# Altium PCB Project_design.PcbDoc
Units mm, origin at the board's own origin, x right, y up, seen from the top; angles counter-clockwise.
Board outline 73 x 40.6 mm, 4 copper layers (Top Layer, Layer 1, Layer 2, Bottom Layer), stack 0.866 mm thick; 56 components, 38 nets, 244 pads, 93 vias.
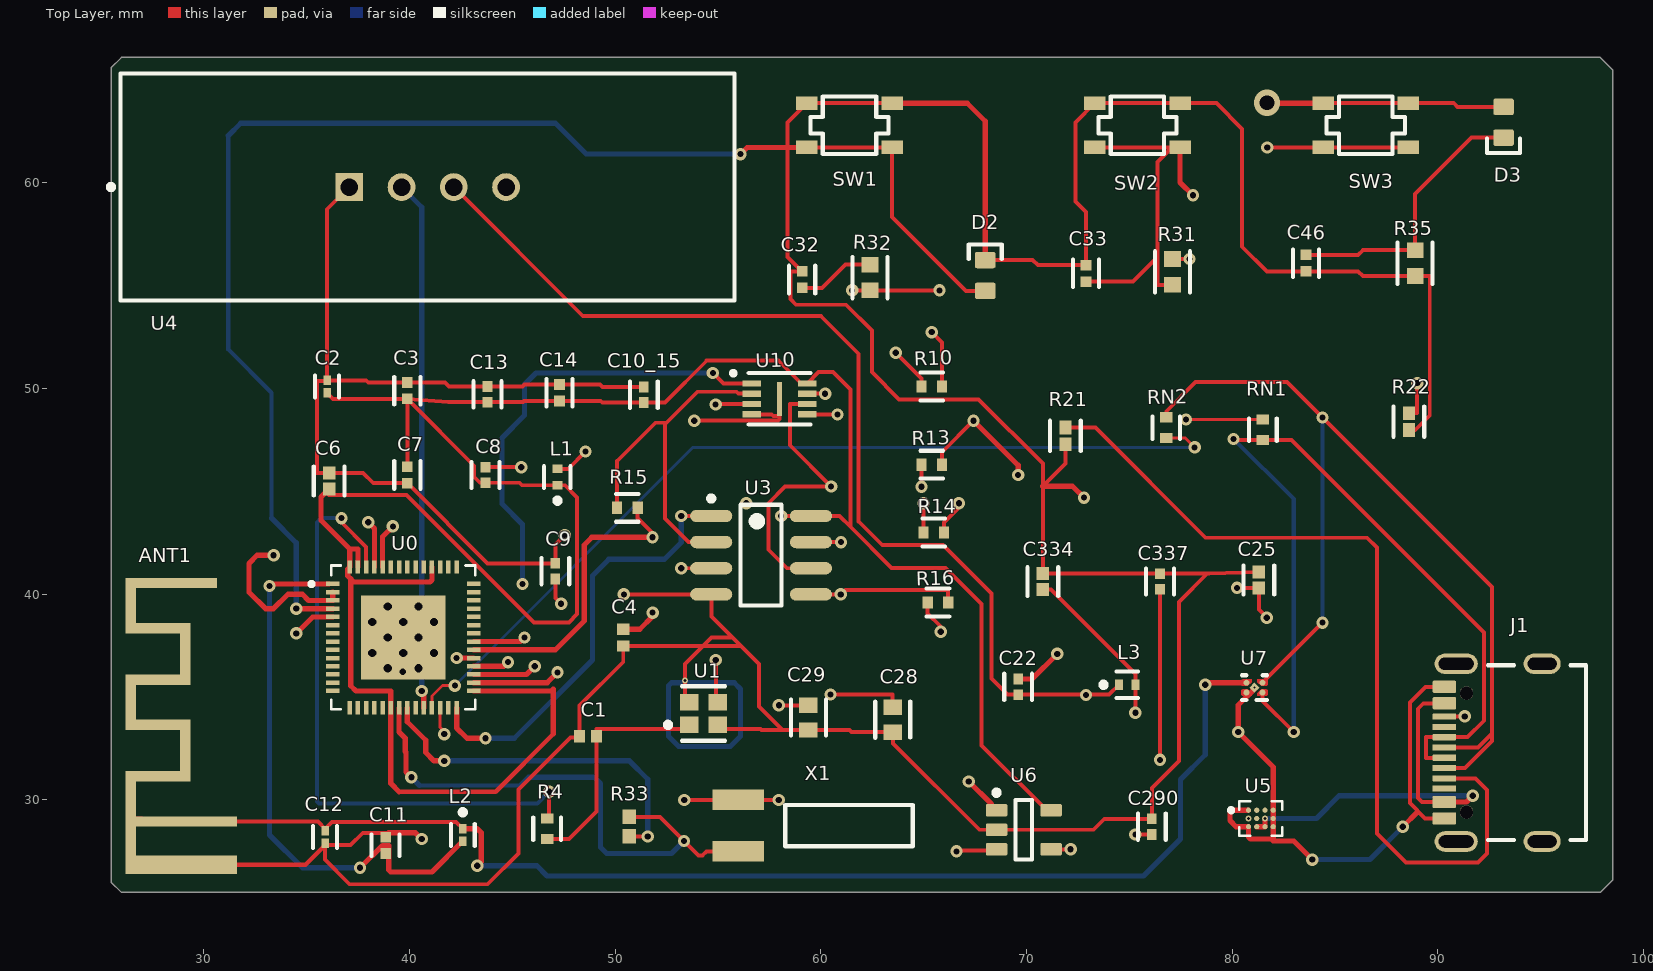
[diagram p0: Top Layer view]
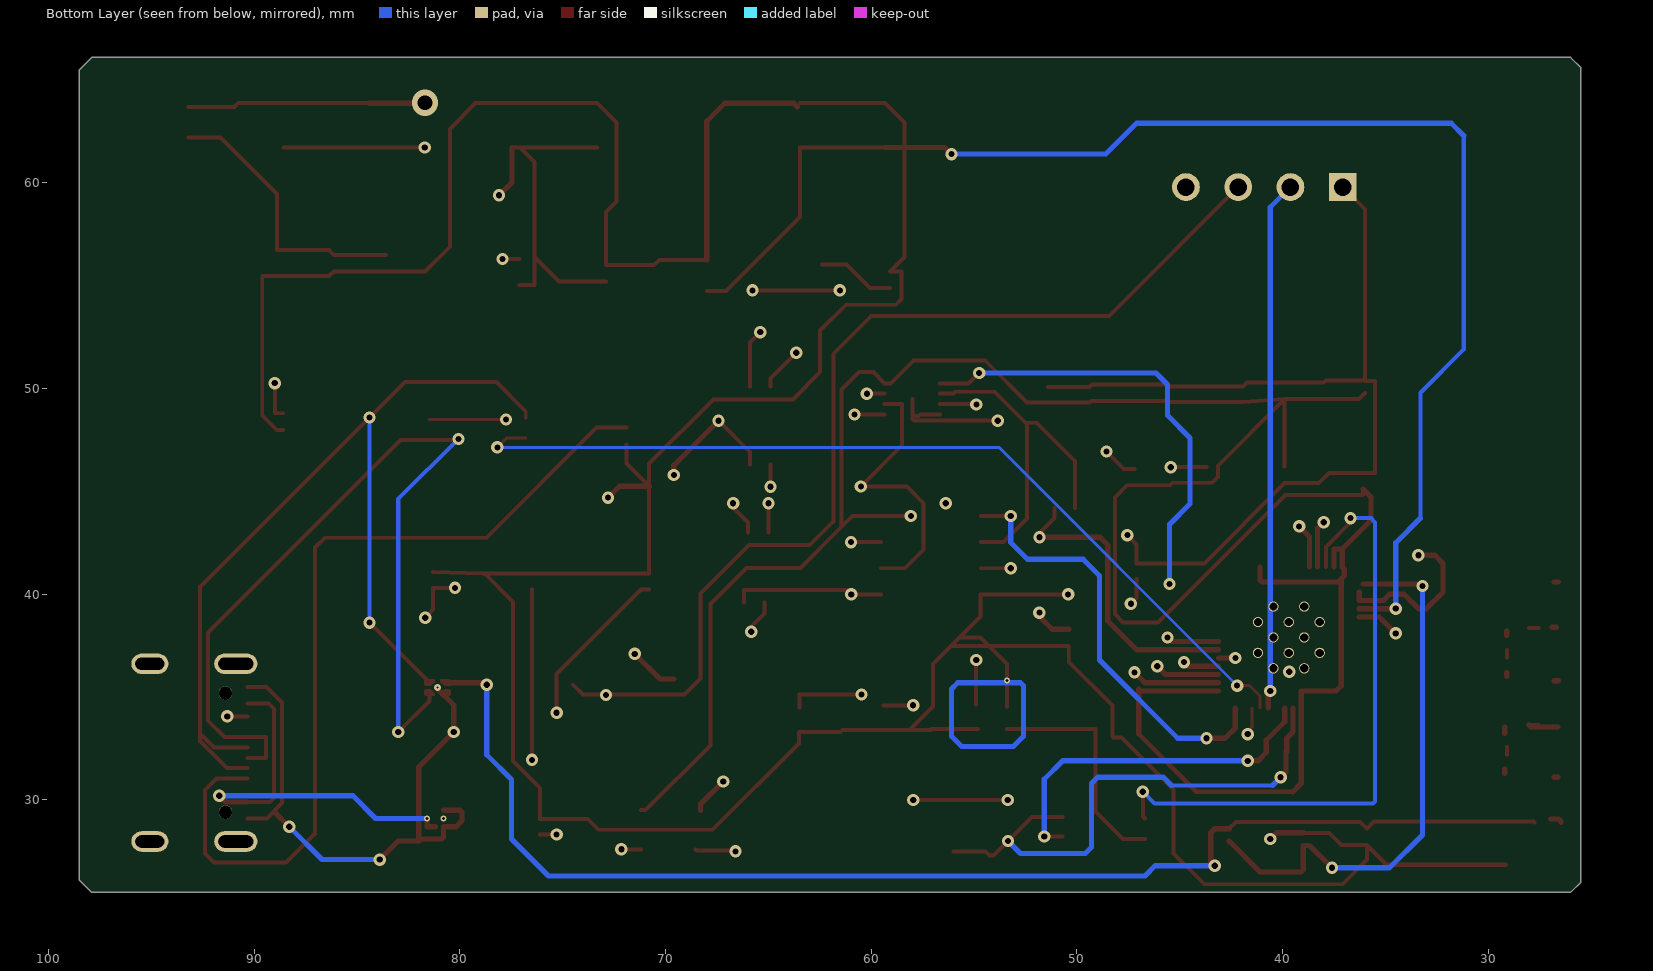
[diagram p1: Bottom Layer view, seen from below]
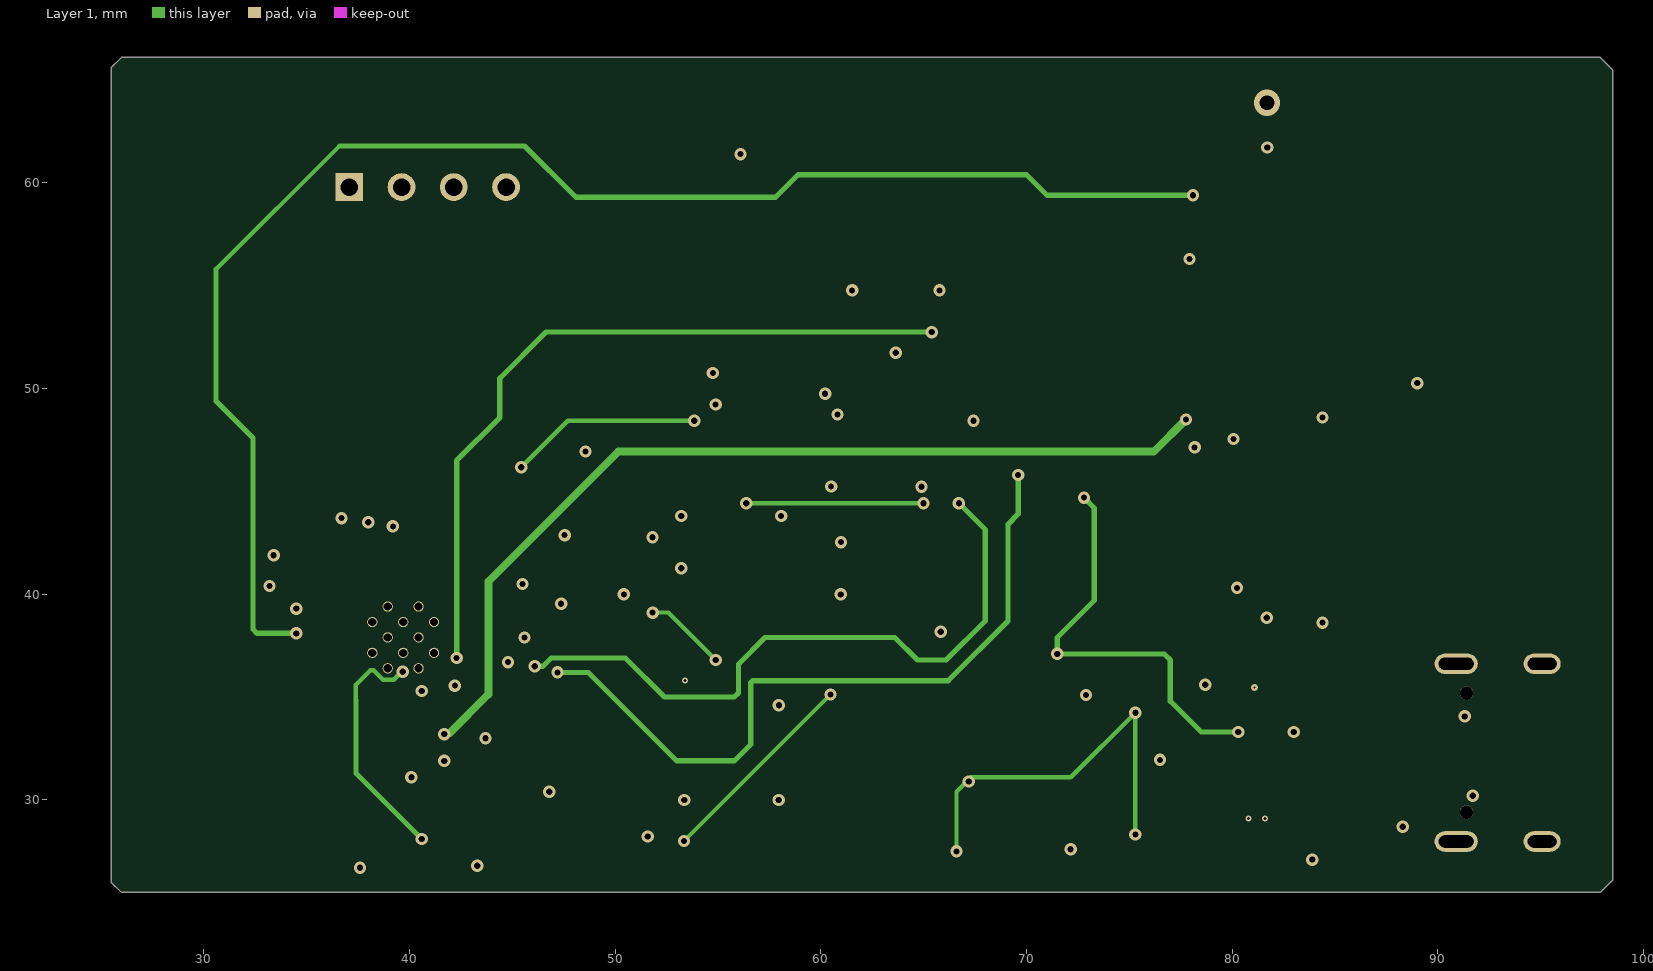
[diagram p2: Layer 1]
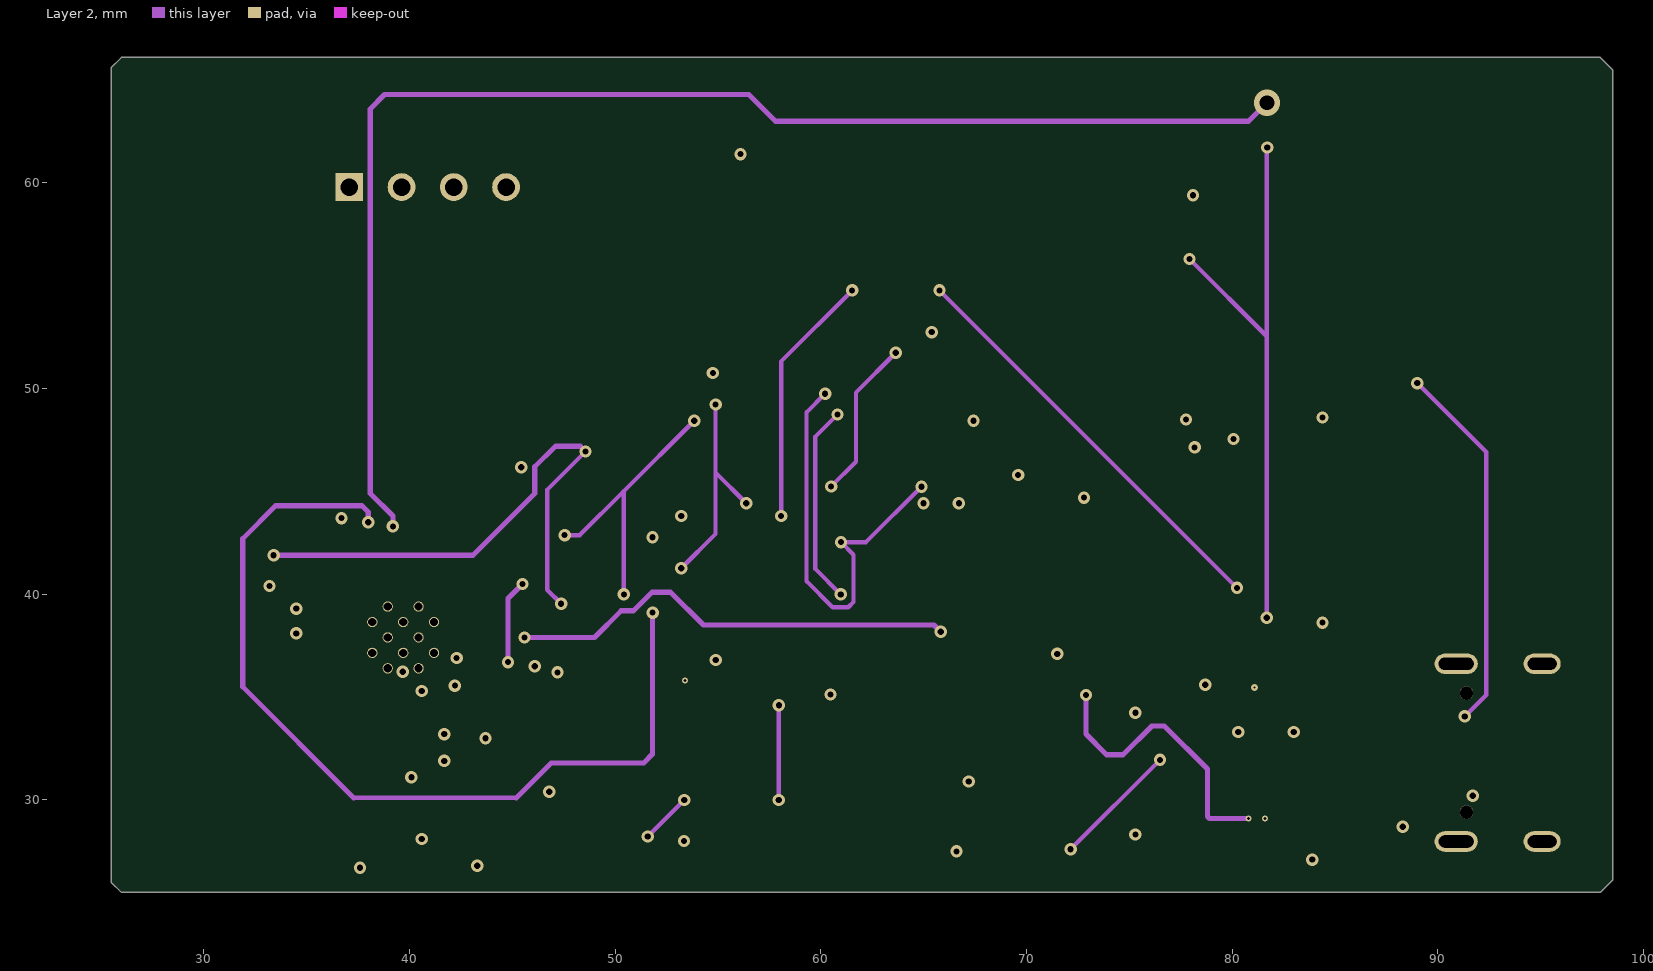
[diagram p3: Layer 2]
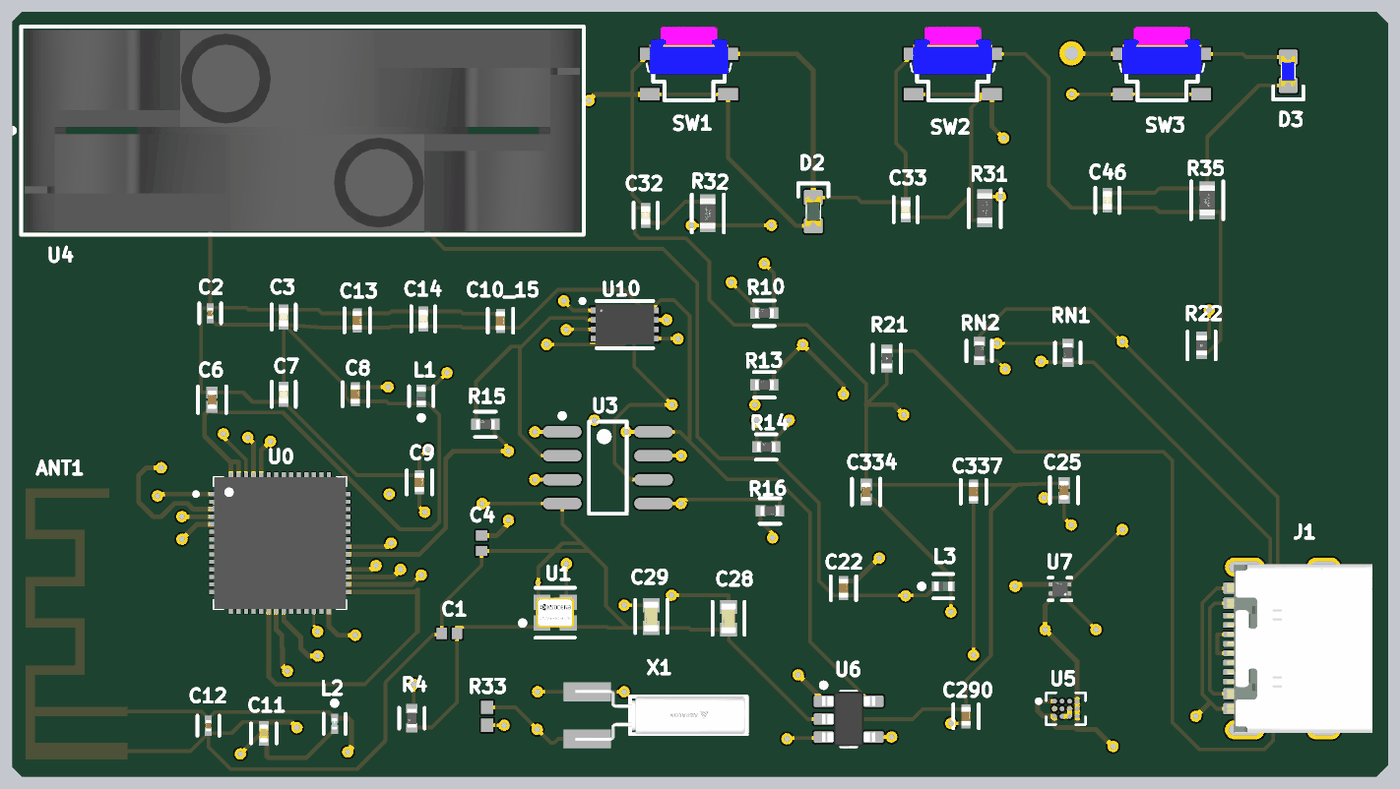
[diagram p4: 3D render of the assembled board from above, using the file's embedded part models]

## Layer stack, top to bottom
Top Solder: solder mask 0.0254, SM-001, Dk 4
Top Layer: signal copper 0.035
Dielectric 2: prepreg 0.125, PP-017, Dk 4.39
Layer 1: signal copper 0.018
Dielectric 1: core 0.51, Core-039, Dk 4.8
Layer 2: signal copper 0.018
Dielectric 3: prepreg 0.125, PP-017, Dk 4.3
Bottom Layer: signal copper 0.035
Bottom Solder: solder mask 0.0254, SM-001, Dk 4

## Board outline
26,25.5 25.5,26 25.5,65.6 26,66.1 97.9,66.1 98.5,65.5 98.5,26.1 97.9,25.5

## Design rules (kind name [scope] priority, off if disabled: settings)
Clearance [All] p1: gap=0.2 ignorepadtopadclearanceinfootprint=TRUE
ComponentClearance [All] p1: gap=0.1 collisioncheckmode=3 verticalgap=0.1 showdistances=FALSE
DiffPairsRouting [All] p1: maxlimit=0.127 minlimit=0.127 mostfreqgap=0.127 toplayer_minwidth=0.17 toplayer_maxwidth=0.17 toplayer_prefwidth=0.142 bottomlayer_minwidth=0.17 bottomlayer_maxwidth=0.17 bottomlayer_prefwidth=0.144 impedanceprofiledriven=TRUE impedanceprofileid={6EB5AD4E-70EF-4733-A1FE-2143B0D5DECB} impedanceprofilevalue=90.000000 maxuncoupledlength=12.7
MinimumSolderMaskSliver [All] p1: minsoldermaskwidth=0.04
PolygonConnect [All] p1: thpad.connectstyle=Relief thpad.reliefconductorwidth=0.254 thpad.reliefentries=4 thpad.polygonreliefangle="90 Angle" thpad.airgapwidth=0.254 smdpad.connectstyle=Relief smdpad.reliefconductorwidth=0.254 smdpad.reliefentries=4 smdpad.polygonreliefangle="90 Angle" smdpad.airgapwidth=0.254 via.connectstyle=Direct via.reliefconductorwidth=0.254 via.reliefentries=4 via.polygonreliefangle="90 Angle" via.airgapwidth=0.254
RoutingVias [All] p1: holewidth=0.3 width=0.6 viastyle="Through Hole" minholewidth=0.2 minwidth=0.5 maxholewidth=0.3 maxwidth=0.6
SolderMaskExpansion [All] p1: expansion=0.102 istentingtop=FALSE
Width Width_POWER [InNetClass('POWER')] p1: maxlimit=0.5 minlimit=0.2 preferedwidth=0.3
Width [All] p2: maxlimit=0.21 minlimit=0.21 preferedwidth=0.21 toplayer_prefwidth=0.193 bottomlayer_prefwidth=0.196 impedanceprofiledriven=TRUE impedanceprofileid={412C0BFB-8EE2-404E-908C-6D13CEE38AFA} impedanceprofilevalue=50.000000 minimp=50.000000 maximp=50.000000 favimp=50.000000
27 further rules are at their usual default settings.

## Classes and differential pairs
differential pair D: +D_P -D_N

## Components (designator, comment, footprint, x,y, rotation, side; value= is the part's Value field where it differs from the comment)
ANT1 "ANT_IFA_USB_2_4GHZ_50R" ANT_IFA_USB_2_4GHZ_50R 31.61,26.85 r90 top
C1 "5.6pF" CAPC1006X50X20LL10T10 48.69,33.1 r0 top
C2 "10nF" FP-GRM033-0_03-IPC_B 36,50.1 r90 top
C3 "1uF" FP-C0402C105K9PACTU-MFG 39.9,49.9 r90 top
C4 "5.6pF" CAPC1006X50X20LL10T10 50.4,37.89 r90 top
C6 "10uF" FP-GRM155-0_2-IPC_C 36.1,45.511 r90 top
C7 "1uF" FP-C0402C105K9PACTU-MFG 39.9,45.8 r270 top
C8 "0.1uF" FP-CL278-IPC_C 43.7,45.8 r90 top
C9 "0.1uF" FP-CL278-IPC_C 47.1,41.121 r90 top
C10_15 "0.1uF" FP-CL278-IPC_C 51.4,49.7 r90 top
C11 "4.6pF" FP-CBR04C-MFG 38.846,27.791 r270 top value="4.6 pF"
C12 "3.9pF" FP-GRM033-0_03-IPC_B 35.9,28.2 r270 top
C13 "0.1uF" FP-CL278-IPC_C 43.8,49.721 r90 top
C14 "1uF" FP-C0402C105K9PACTU-MFG 47.3,49.8 r90 top
C22 "100nF" FP-CL278-IPC_C 69.6,35.5 r90 top
C25 "10uF" FP-GRM155-0_2-IPC_C 81.3,40.7 r90 top
C28 "22pF" FP-C0603C-CF-MFG 63.5,33.9 r90 top value="22 pF"
C29 "22pF" FP-C0603C-CF-MFG 59.4,34 r90 top value="22 pF"
C32 "1uF" FP-C0402C105K9PACTU-MFG 59.1,55.3 r90 top
C33 "1uF" FP-C0402C105K9PACTU-MFG 72.9,55.6 r90 top
C46 "1uF" FP-C0402C105K9PACTU-MFG 83.6,56.1 r270 top
C290 "100nF" FP-CL278-IPC_C 76.1,28.7 r90 top
C334 "10uF" FP-GRM155-0_2-IPC_C 70.8,40.611 r90 top
C337 "100nF" FP-CL278-IPC_C 76.5,40.621 r90 top
D2 "GREEN" LED_0603_GREEN 68,55.5 r270 top
D3 "BLUE" LED_0603_BLUE 93.2,62.95 r90 top
J1 "USB4105-GF-A-060" USB4105-GF-A-060 92.7,32.3 r90 top
L1 "2.0nH(0.1nH)" FP-LQG15HH_02-MFG 47.2,45.7 r90 top
L2 "1.8nH" FP-LQP03TG_02-IPC_B 42.6,28.3 r270 top
L3 "2.0nH(0.1nH)" FP-LQG15HH_02-MFG 74.9,35.6 r0 top
R4 "0 Ohm" FP-RMCF0402-MFG 46.7,28.6 r90 top
R10 "0 Ohm" FP-RMCF0402-MFG 65.4,50.1 r0 top
R13 "0 Ohm" FP-RMCF0402-MFG 65.4,46.3 r0 top
R14 "0 Ohm" FP-RMCF0402-MFG 65.5,43 r0 top
R15 "0 Ohm" FP-RMCF0402-MFG 50.6,44.2 r0 top
R16 "0 Ohm" FP-RMCF0402-MFG 65.7,39.6 r180 top
R21 "5k" FP-PNM0402-IPC_C 71.9,47.7 r90 top
R22 "5k" FP-PNM0402-IPC_C 88.6,48.393 r90 top
R31 "10k" FP-CRGP0603-IPC_C 77.1,55.673 r90 top value=10KΩ
R32 "10k" FP-CRGP0603-IPC_C 62.4,55.4 r270 top value=10KΩ
R33 "5.6M" RESC1005X40X25ML05T10 50.7,28.7 r90 top
R35 "10k" FP-CRGP0603-IPC_C 88.9,56.1 r90 top value=10KΩ
RN1 "0 Ohm" FP-RMCF0402-MFG 81.5,48 r90 top
RN2 "0 Ohm" FP-RMCF0402-MFG 76.8,48.1 r270 top
SW1 "SKRPANE010" SKRPANE010 61.4,62.8 r0 top
SW2 "SKRPANE010" SKRPANE010 75.4,62.8 r0 top
SW3 "SKRPANE010" SKRPANE010 86.5,62.8 r0 top
U0 "ESP32-S3" IC_ESP32-S3 39.7,37.9 r0 top
U1 "CX2016DB40000D0FLJCC" FP-CX2016DB-MFG 54.3,34.2 r0 top
U3 "23LC512-I/SN" MCHP-SOIC-SN8_N 57.1,41.9 r0 top
U4 "MPX5100DP" FP-SOT1754-1-MFG 40.89,59.8 r0 top
U5 "TPD1S514-1YZR" BGA12N40P3X4_140X189X62N 81.4,29.1 r0 top
U6 "SPX3819M5-L-3-3/TR" SOT-23-5 69.875,28.55 r0 top
U7 "TPD4E110DPWR" FP-DPW0004A-MFG 81.09,35.46 r180 top
U10 "W25Q16JVUXIQ" USON-8-2X3MM 58,49.5 r0 top
X1 "AB26TRB" FP-AB26TRB-MFG 61.375,28.75 r180 top

## Footprints (in the part's own frame and the unit in brackets; to place one, negate y for a bottom-side part, rotate by r counter-clockwise, add the part's x,y. Pads: shape width x height; smd on the part's side, far side on the other; paste and mask are expansions set on the pad)
ANT_IFA_USB_2_4GHZ_50R [mm]
  rect 5x0.5 smd paste-2539.97 mask+0.102: 1(2.05,5.15)
  rect 0.5x4.9 smd paste-2539.97 mask+0.102: 1(2.1,2.45)
  rect 0.5x2.64 smd paste-2539.97 mask+0.102: 1(4.3,3.58) 1(6.8,3.58) 1(9,3.58) 1(11.5,3.58)
  rect 2x0.5 smd paste-2539.97 mask+0.102: 1(5.55,2.51) 1(10.25,2.51)
  rect 2.7x0.5 smd paste-2539.97 mask+0.102: 1(7.9,5.15) 1(12.6,5.15)
  rect 0.5x3.94 smd paste-2539.97 mask+0.102: 1(13.7,2.93)
  rect 0.9x4.9 smd paste-2539.97 mask+0.102: 2(0,2.45)
BGA12N40P3X4_140X189X62N [mm]
  round 0.25 smd: A1(-0.6,0.4) A2(-0.2,0.4) A3(0.2,0.4) A4(0.6,0.4) B1(-0.6,0) B2(-0.2,0) B3(0.2,0) B4(0.6,0) C1(-0.6,-0.4) C2(-0.2,-0.4) C3(0.2,-0.4) C4(0.6,-0.4)
  silkscreen extent -1.54,-0.85 1.04,0.85
CAPC1006X50X20LL10T10 [mm] "Chip Capacitor, 2-Leads, Body 1.00x0.55mm, IPC High Density"
  rect 0.54x0.6 smd: 1(-0.41,0) 2(0.41,0)
  body extent -0.55,-0.33 0.55,0.33, height 0.5
FP-AB26TRB-MFG [mm]
  rect 2.5x1 smd paste+0 mask+0: 1(5.375,1.25) 2(5.375,-1.25)
  silkscreen extent -3.1,-1 3.1,1, body extent -3.2,-1.85 6.73,1.85, height 0.25
FP-C0402C105K9PACTU-MFG [mm]
  rect 0.52x0.52 smd paste+0 mask+0: 1(-0.4,0) 2(0.4,0)
  silkscreen extent -0.67,-0.64 0.67,0.64, body extent -0.8,-0.4 0.8,0.4, height 0.25
FP-C0603C-CF-MFG [mm]
  rect 0.75x0.9 smd paste+0 mask+0: 1(-0.6,0) 2(0.6,0)
  silkscreen extent -0.87,-0.85 0.88,0.85, body extent -1.2,-0.6 1.2,0.6, height 0.25
FP-CBR04C-MFG [mm]
  rect 0.52x0.52 smd paste+0 mask+0: 1(-0.4,0) 2(0.4,0)
  silkscreen extent -0.53,-0.68 0.52,0.67, body extent -0.8,-0.4 0.8,0.4, height 0.25
FP-CL278-IPC_C [mm]
  rect 0.515x0.472 smd paste+0 mask+0: 1(-0.379,0) 2(0.379,0)
  silkscreen extent -0.64,-0.67 0.64,0.68, body extent -0.74,-0.38 0.74,0.38, height 0.25
FP-CRGP0603-IPC_C [mm]
  rect 0.758x0.812 smd paste+0 mask+0: 1(-0.627,0) 2(0.627,0)
  silkscreen extent -1.01,-0.85 1.01,0.85, body extent -1.11,-0.55 1.11,0.55, height 0.25
FP-CX2016DB-MFG [mm]
  rect 0.9x0.8 smd paste+0 mask+0: 1(-0.7,-0.55) 2(0.7,-0.55) 3(0.7,0.55) 4(-0.7,0.55)
  silkscreen extent -1.85,-1.32 1.05,1.33, body extent -1.25,-1.05 1.25,1.05, height 0.25
FP-DPW0004A-MFG [mm]
  round 0.288 smd paste-1000 mask-1000: 1(-0.39,0.24) 2(-0.39,-0.24) 3(0.39,-0.24) 4(0.39,0.24)
  rect 0.35x0.35 smd rot 135 paste-1000 mask-1000: 5(0,0)
  Top Layer region: -0.65,0.3 -0.637,0.35 -0.6,0.387 -0.55,0.4 -0.55,0.4 -0.13,0.4 -0.13,0.269 -0.319,0.08 -0.55,0.08 -0.6,0.093 -0.637,0.13 -0.65,0.18 -0.65,0.18
  Top Layer region: -0.65,-0.3 -0.637,-0.35 -0.6,-0.387 -0.55,-0.4 -0.55,-0.4 -0.13,-0.4 -0.13,-0.269 -0.319,-0.08 -0.55,-0.08 -0.588,-0.088 -0.621,-0.109 -0.642,-0.142 -0.65,-0.18 -0.65,-0.18
  Top Layer region: 0.65,-0.3 0.637,-0.35 0.6,-0.387 0.55,-0.4 0.55,-0.4 0.13,-0.4 0.13,-0.269 0.319,-0.08 0.55,-0.08 0.588,-0.088 0.621,-0.109 0.642,-0.142 0.65,-0.18 0.65,-0.18
  Top Layer region: 0.65,0.3 0.637,0.35 0.6,0.387 0.55,0.4 0.55,0.4 0.13,0.4 0.13,0.269 0.319,0.08 0.55,0.08 0.588,0.088 0.621,0.109 0.642,0.142 0.65,0.18 0.65,0.18
  silkscreen extent -0.6,-0.6 0.6,0.6, body extent -0.75,-0.53 0.75,0.53, height 0.25
FP-GRM033-0_03-IPC_B [mm]
  rect 0.454x0.363 smd paste+0 mask+0: 1(-0.304,0) 2(0.304,0)
  silkscreen extent -0.53,-0.58 0.53,0.58, body extent -0.68,-0.33 0.68,0.33, height 0.25
FP-GRM155-0_2-IPC_C [mm]
  rect 0.628x0.606 smd paste+0 mask+0: 1(-0.389,0) 2(0.389,0)
  silkscreen extent -0.7,-0.75 0.7,0.75, body extent -0.8,-0.45 0.8,0.45, height 0.25
FP-LQG15HH_02-MFG [mm]
  rect 0.4x0.5 smd paste+0 mask+0: 1(-0.4,0) 2(0.4,0)
  silkscreen extent -1.27,-0.64 0.52,0.65, body extent -0.7,-0.38 0.7,0.38, height 0.25
FP-LQP03TG_02-IPC_B [mm]
  rect 0.454x0.363 smd paste+0 mask+0: 1(-0.304,0) 2(0.304,0)
  silkscreen extent -1.22,-0.58 0.53,0.58, body extent -0.68,-0.33 0.68,0.33, height 0.25
FP-PNM0402-IPC_C [mm]
  rect 0.663x0.595 smd paste+0 mask+0: 1(-0.407,0) 2(0.407,0)
  silkscreen extent -0.74,-0.74 0.74,0.74, body extent -0.84,-0.44 0.84,0.44, height 0.25
FP-RMCF0402-MFG [mm]
  rect 0.5x0.6 smd paste+0 mask+0: 1(-0.5,0) 2(0.5,0)
  silkscreen extent -0.55,-0.68 0.55,0.67, body extent -0.85,-0.4 0.85,0.4, height 0.25
FP-SOT1754-1-MFG [mm]
  rect 1.35x1.35 hole 0.85 paste-1000 mask+0: 1(-3.81,0)
  round 1.35 hole 0.85 paste-1000 mask+0: 2(-1.27,0) 3(1.27,0) 4(3.81,0)
  silkscreen extent -15.52,-5.53 14.93,5.52, body extent -15.02,-5.63 15.02,5.63, height 0.25
IC_ESP32-S3 [mm]
  rect 0.65x0.22 smd mask+0.05: 1(-3.425,2.6) 2(-3.425,2.2) 3(-3.425,1.8) 4(-3.425,1.4) 5(-3.425,1) 6(-3.425,0.6) 7(-3.425,0.2) 8(-3.425,-0.2) 9(-3.425,-0.6) 10(-3.425,-1) 11(-3.425,-1.4) 12(-3.425,-1.8) 13(-3.425,-2.2) 14(-3.425,-2.6) 29(3.425,-2.6) 30(3.425,-2.2) 31(3.425,-1.8) 32(3.425,-1.4) 33(3.425,-1) 34(3.425,-0.6) 35(3.425,-0.2) 36(3.425,0.2) 37(3.425,0.6) 38(3.425,1) 39(3.425,1.4) 40(3.425,1.8) 41(3.425,2.2) 42(3.425,2.6)
  rect 0.22x0.65 smd mask+0.05: 15(-2.6,-3.425) 16(-2.2,-3.425) 17(-1.8,-3.425) 18(-1.4,-3.425) 19(-1,-3.425) 20(-0.6,-3.425) 21(-0.2,-3.425) 22(0.2,-3.425) 23(0.6,-3.425) 24(1,-3.425) 25(1.4,-3.425) 26(1.8,-3.425) 27(2.2,-3.425) 28(2.6,-3.425) 43(2.6,3.425) 44(2.2,3.425) 45(1.8,3.425) 46(1.4,3.425) 47(1,3.425) 48(0.6,3.425) 49(0.2,3.425) 50(-0.2,3.425) 51(-0.6,3.425) 52(-1,3.425) 53(-1.4,3.425) 54(-1.8,3.425) 55(-2.2,3.425) 56(-2.6,3.425)
  rect 4.1x4.1 smd paste-1.55: 57(0,0)
  round 0.5 hole 0.4 mask+0: 58(-0.75,1.5) 59(0.75,1.5) 60(-1.5,0.75) 61(0,0.75) 62(1.5,0.75) 63(-0.75,0) 64(0.75,0) 65(-1.5,-0.75) 66(0,-0.75) 67(1.5,-0.75) 68(-0.75,-1.5) 69(0.75,-1.5)
  silkscreen extent -4.55,-3.5 3.5,3.5, body extent -3.5,-3.5 3.5,3.5, height 0.9
LED_0603_BLUE [mm]
  rrect25% 0.8x1 smd: A(0.75,0) K(-0.75,0)
  silkscreen extent -1.5,-0.8 -0.8,0.8, body extent -0.8,-0.4 0.8,0.4, height 0.6
LED_0603_GREEN [mm]
  rrect25% 0.8x1 smd: A(0.75,0) K(-0.75,0)
  silkscreen extent -1.5,-0.8 -0.8,0.8, body extent -0.8,-0.4 0.8,0.4, height 0.6
MCHP-SOIC-SN8_N [mm] "SOIC, 8-Leads, Body 4.9x3.9mm, Pitch 1.27mm, IPC Medium Density"
  oval 2.05x0.6 smd: 1(-2.425,1.905) 2(-2.425,0.635) 3(-2.425,-0.635) 4(-2.425,-1.905) 5(2.425,-1.905) 6(2.425,-0.635) 7(2.425,0.635) 8(2.425,1.905)
  silkscreen extent -2.55,-2.45 1,2.88, body extent -1.95,-2.45 1.95,2.45, height 1.75
RESC1005X40X25ML05T10 [mm] "Chip Resistor, 2-Leads, Body 1.00x0.50mm, IPC Low Density"
  rect 0.7x0.65 smd: 1(-0.475,0) 2(0.475,0)
  body extent -0.53,-0.27 0.53,0.28, height 0.4
SKRPANE010 [mm]
  rect 1.05x0.65 smd: 12(-2.075,1.075) 12(2.075,1.075) 34(-2.075,-1.075) 34(2.075,-1.075)
  silkscreen extent -1.9,-1.4 1.9,1.4, body extent -2.3,-1.6 2.3,1.6, height 2.51
SOT-23-5 [mm] "SOT23, 5-Leads, Body 2,90x2,80mm, Pitch 0,95mm, IPC Medium Density"
  rrect25% 1.05x0.6 smd: 1(-1.325,0.95) 2(-1.325,0) 3(-1.325,-0.95) 4(1.325,-0.95) 5(1.325,0.95)
  silkscreen extent -1.45,-1.45 0.4,1.92, body extent -1.4,-1.45 1.4,1.45, height 1.45
USB4105-GF-A-060 [mm]
  rrect25% 0.6x1.15 smd mask+0.05: A1B12(-3.2,2.377) A4B9(-2.4,2.377) B1A12(3.2,2.377) B4A9(2.4,2.377)
  rrect25% 0.3x1.15 smd mask+0.05: A5(-1.25,2.377) A6(-0.25,2.377) A7(0.25,2.377) A8(1.25,2.377) B5(1.75,2.377) B6(0.75,2.377) B7(-0.75,2.377) B8(-1.75,2.377)
  round 0.65 hole 0.65 unplated mask+0.05: MH(-2.89,1.303) ""(2.89,1.303)
  oval 1x1.8 hole 0.6 slot 1.4 at 90 deg: SH(-4.32,-2.377) SH(4.32,-2.377)
  oval 1x2.1 hole 0.6 slot 1.7 at 90 deg: SH(-4.32,1.803) SH(4.32,1.803)
  silkscreen extent -4.25,-4.5 4.25,0.25, body extent -4.47,-4.97 4.47,2.73, height 3.27
USON-8-2X3MM [mm]
  rect 0.9x0.3 smd mask+0.13: 1(-1.35,0.75) 2(-1.35,0.25) 3(-1.35,-0.25) 4(-1.35,-0.75) 5(1.35,-0.75) 6(1.35,-0.25) 7(1.35,0.25) 8(1.35,0.75)
  rect 0.25x1.65 smd paste-0.1: 9(0,0)
  silkscreen extent -2.35,-1.25 1.5,1.35, body extent -1.55,-1.05 1.55,1.05, height 0.61

## Part data
ANT1: library part CMP-027-000136-1, "Inverted F 2.4GHz ISM PCB Antenna 50 Ohm", ComponentLink1Description=Datasheet, ComponentLink1URL=https://www.ti.com/lit/an/swra117d/swra117d.pdf, Design Item ID=ANT_IFA_USB_2_4GHZ_50R, Source=Schematic-Lib-PhilsLab.SchLib
C1 C4: library part CMP-2008-04814-1, Manufacturer="AVX Interconnect / Elco", Part Number=04023J5R6BBSTR
C2: library part CMP-2010-01684-2, "Chip Multilayer Ceramic Capacitors for General Purpose, 0201, 10000pF, X7R, 15%, 10%, 10V", Case Code (Imperial)=0201, Case Code (Metric)=0603, Dielectric=X7R, Max Operating Temperature=125°C, Min Operating Temperature=-55°C, Package Quantity=1, Tolerance=10%, Voltage=10V, Capacitance=10nF, Case/Package=0201, Depth=0.3mm, Height=0.3mm, Lead Free="Lead Free", Length=0.6mm, Material=Ceramic, Mount="Surface Mount", Packaging="Tape and Reel", Radiation Hardening=No, REACH SVHC="No SVHC", Termination=SMD/SMT, Thickness=0.013inch, Voltage Rating=10V, Voltage Rating (DC)=10V, Width=0.012inch
C3 C7 C14 C32 C33 C46: library part CMP-2008-02075-2, "CAP CER 1UF 6.3V X5R 0402", Case Code (Imperial)=0402, Dielectric=X5R, Dielectric Material=Ceramic, Max Operating Temperature=85°C, Min Operating Temperature=-55°C, Package Quantity=1, Tolerance=10%, Voltage=6.3V, Capacitance=1uF, Case/Package=0402, Construction=Flat, Depth=0.5mm, Height=0.5mm, Lead Free="Lead Free", Lead Pitch=0.3mm, Length=1mm, Mount="Surface Mount", Number of Pins=2, Packaging="Tape and Reel", Radiation Hardening=No, REACH SVHC="No SVHC", RoHS Compliant=Yes, Series=C, Termination=SMD/SMT, Thickness=0.022inch, Voltage Rating=6.3V, Voltage Rating (DC)=6.3V, Width=0.02inch
C6 C25 C334: library part CMP-06035-044652-1, "Chip Multilayer Ceramic Capacitors for General Purpose, 0402, 10uF, X5R, 15%, 20%, 6.3V"
C8 C9 C10_15 C13: library part CMP-13271-000728-1, "Cap Ceramic 100nF 25V X5R ±10% SMD 0402 +85°C Paper T/R", Capacitance=100nF, Case Code (Imperial)=0402, Case Code (Metric)=1005, Dielectric=X5R, Max Operating Temperature=85°C, Min Operating Temperature=-55°C, Package Quantity=1, Tolerance=10%, Voltage=25V, Case/Package=0402, Depth=0.5mm, Height=0.5mm, Lead Free="Lead Free", Length=1mm, Mount="Surface Mount", Packaging="Tape and Reel", Radiation Hardening=No, Thickness=0.022inch, Voltage Rating=25V, Voltage Rating (DC)=25V, Width=0.02inch
C11: library part CMP-03020-033502-1, "CBR0402 4.6 pF 30ppm/°C 0.1 pF C0G 50 V", Capacitance="4.6 pF", Manufacturer=KEMET, Manufacturer Part Number=CBR04C469B5GAC, Package=CBR04C, Temperature="-55°C to +125°C", Temperature Characteristic=C0G, Temperature Coefficient=30ppm/°C, Temperature Range High=+125°C, Temperature Range Low=-55°C, Tolerance="0.1 pF", Voltage Rating="50 V", Automotive=No, Category=Cap, ComponentLink2Description=Datasheet, ComponentLink2URL=https://content.kemet.com/datasheets/KEM_C1030_CBR_SMD.pdf, Device Class L1="Passive Components", Device Class L2=Capacitors, Device Class L3="Ceramic Capacitors", Height=0.55mm, Ipc Land Pattern Name=CAPC10050X50, Lead Free=Yes, Material=Ceramic, Mouser Description="Cap Ceramic 4.6pF 50V C0G 0.1pF SMD 0402 125°C Paper T/R", Octopart=https://octopart.com/cbr04c469b5gac-kemet-86730458, RoHS=TRUE
C12: library part CMP-2010-01120-2, "Chip Multilayer Ceramic Capacitors for General Purpose, 0201, 3.9pF, C0G, 30ppm/°C, 0.25pF, 50V", Case/Package=0201, Max Operating Temperature=125°C, Min Operating Temperature=-55°C, Package Quantity=15000, Voltage Rating=50V, Capacitance=3.9pF, Length=0.024inch, Mount="Surface Mount", Packaging="Tape and Reel", Termination=SMD/SMT, Thickness=0.013inch, Voltage Rating (DC)=50V, Width=0.012inch
C22 C290 C337: library part CMP-13271-000728-1, "Cap Ceramic 100nF 25V X5R ±10% SMD 0402 +85°C Paper T/R", Case Code (Imperial)=0402, Case Code (Metric)=1005, Dielectric=X5R, Max Operating Temperature=85°C, Min Operating Temperature=-55°C, Package Quantity=1, Tolerance=10%, Voltage=25V, Capacitance=100nF, Case/Package=0402, Depth=0.5mm, Height=0.5mm, Lead Free="Lead Free", Length=1mm, Mount="Surface Mount", Packaging="Tape and Reel", Radiation Hardening=No, Thickness=0.022inch, Voltage Rating=25V, Voltage Rating (DC)=25V, Width=0.02inch
C28 C29: library part CMP-2006-03119-3, "Cap Ceramic 22pF 50V C0G 5% SMD 0603 125°C Paper T/R", Capacitance="22 pF", Manufacturer=KEMET, Manufacturer Part Number=C0603C220J5GACTU, Package=C0603C-CF, Temperature="-55°C to +125°C", Temperature Characteristic=C0G, Temperature Coefficient=30ppm/°C, Temperature Range High=+125°C, Temperature Range Low=-55°C, Tolerance=0.05, Voltage Rating="50 V", Automotive=Yes, Automotive Grade="Grade 1", Category=Cap, ComponentLink2Description=Datasheet, ComponentLink2URL=https://api.kemet.com/component-edge/download/datasheet/C0603C100J5GACAUTO.pdf, Device Class L1="Passive Components", Device Class L2=Capacitors, Device Class L3="Ceramic Capacitors", Digikey Description="Cap Ceramic 22pF 50V C0G 5% SMD 0603 125°C Paper T/R", Height=0.87mm, Lead Free=Yes, Material=Ceramic, Mouser Description="Cap Ceramic 22pF 50V C0G 5% SMD 0603 125°C Paper T/R", Octopart=https://octopart.com/c0603c220j5gactu-kemet-98525, RoHS=TRUE
D2: library part LED_0603_GREEN, "LED 0603 GREEN SMD", Supplier Part Number 1=LTST-C190GKT, Supplier 1="Arrow Electronics"
D3: library part LED_0603_BLUE, "LED 0603 BLUE SMD", Supplier Part Number 1=LTST-C191TBKT, Supplier 1="Arrow Electronics"
J1: library part CMP-002-00129-1, "USB Connector Type C SMT 12 Pin", Manufacturer=GCT, Design Item ID=USB4105-GF-A-060, Distributor Link=https://eu.mouser.com/ProductDetail/GCT/USB4105-GF-A-060?qs=QNEnbhJQKvY2mocwNJzgfA%3D%3D, Manufacturer Part Number=USB4105-GF-A-060, Source=Schematic-Lib-PhilsLab.SchLib
L1 L3: library part CMP-06042-013960-1, "Multilayer type RF Inductor 2nH ±0.1nH 0.09Ω 900mA 0402"
L2: library part CMP-06042-011516-1, "Film type RF Inductor 1.8nH ±0.1nH 600mA 0.15Ω 0201 (0603)", Case Code (Imperial)=0201, Case Code (Metric)=0603, Current=450mA, Current Rating=600mA, DC Resistance (DCR)=150mR, Max Operating Temperature=125°C, Min Operating Temperature=-55°C, Package Quantity=15000, Resistor Type="Thin Film", Self Resonant Frequency=6GHz, Test Frequency=500MHz, Case/Package=0201, Core Material=Non-Magnetic, DC Current=600mA, Depth=0.33mm, Height=0.012inch, Height - Seated (Max)=0.013inch, Inductance=1.8nH, Length=0.024inch, Max DC Current=600mA, Military Standard=Not, Mount="Surface Mount", Packaging="Tape and Reel", Q Factor=14, Radiation Hardening=No, REACH SVHC="No SVHC", Shielding=Unshielded, Termination=SMD/SMT, Width=0.012inch
R4 R10 R13 R14 R15 R16 RN1 RN2: library part CMP-26527-007617-1, "RES 0 OHM JUMPER 1/16W 0402", Case Code (Imperial)=0402, Case Code (Metric)=1005, Current Rating=1A, Max Operating Temperature=155°C, Max Power Dissipation=63mW, Min Operating Temperature=-55°C, Resistance=0R, Resistor Type="Thick Film", Working Voltage=50V, Case/Package=0402, Construction=Rectangular, Contact Plating=Tin, Depth=0.5mm, Features="Automotive AEC-Q200", Height=0.016inch, Lead Free="Lead Free", Length=0.039inch, Military Standard=Not, Mount="Surface Mount", Number of Terminations=2, Packaging="Tape and Reel", Power Rating=63mW, Radiation Hardening=No, RoHS Compliant=Yes, Series=RMCF, Technology="THICK FILM", Width=0.02inch
R21 R22: library part CMP-02407-012302-1, "RES SMD 5K OHM 0.1% 1/20W 0402", Case Code (Imperial)=0402, Case Code (Metric)=1005, Max Operating Temperature=155°C, Max Power Dissipation=50mW, Min Operating Temperature=-55°C, Package Quantity=1000, Resistance=5kR, Resistor Type="Thin Film", Temperature Coefficient=25ppm/°C, Tolerance=0.1%, Case/Package=0402, Features="Moisture Resistant", Height=0.033inch, Length=0.042inch, Number of Terminations=2, Packaging="Tape and Reel", RoHS Compliant=Yes, Width=0.022inch
R31 R32 R35: library part CMP-03211-004414-1, "CRGP 0603 10K 1%", Ambient Temperature Range High=+70°C, Manufacturer=TE, Manufacturer Part Number=CRGP0603F10K, Package=CRGP0603, Power Rating=0.25W, Resistance=10KΩ, Temperature="-55°C to +155°C", Temperature Coefficient=±100ppm/°C, Temperature Range High=+155°C, Temperature Range Low=-55°C, Tolerance=0.01, Voltage Rating=50V, Automotive=No, Category=Res, ComponentLink2Description=Datasheet, ComponentLink2URL=https://www.te.com/commerce/DocumentDelivery/DDEController?Action=srchrtrv&DocNm=9-1773463-9&DocType=DS&DocLang=English, Composition="Thick Film", Device Class L1="Passive Components", Device Class L2=Resistors, Device Class L3="Chip SMD Resistors", Digikey Description="CRGP 0603 10K 1%", Height=0.55mm, Ipc Land Pattern Name=RESC16080X45, Lead Free=Yes, Mouser Description="Res, 10K, 1%, 0.25W, 0603, Thick Film", Octopart=https://octopart.com/crgp0603f10k-te+connectivity-91018721, RoHS=TRUE, Series=CRGP
R33: library part CMP-2002-07139-1, Manufacturer="Yageo / Phycomp", Part Number=RC0402JR-075M6L
SW1: "Tactile Switch SMD SPST", Manufacturer="Alps Alpine", Supplier Part Number 1=688-SKRPANE010, Manufacturer Part Number=SKRPANE010, Supplier 1=Mouser
SW2 SW3: "Tactile Switch SMD SPST", Manufacturer="Alps Alpine", Manufacturer Part Number=SKRPANE010
U0: library part CMP-031-00008-2, "IC RF TxRx + MCU Bluetooth, WiFi 802.11b/g/n, Bluetooth v5.0 2.412GHz ~ 2.484GHz 56-VFQFN Exposed Pad", Case/Package=None, Availability="In Stock", Check_prices=https://www.snapeda.com/parts/ESP32-S3/Espressif+Systems/view-part/?ref=eda, Component Type=Standard, Design Item ID=ESP32-S3, MF="Espressif Systems", MP=ESP32-S3, Pins=57, Price=None, Purchase-URL=https://pricing.snapeda.com/search/part/ESP32-S3/?ref=eda, SnapEDA_Link=https://www.snapeda.com/parts/ESP32-S3/Espressif+Systems/view-part/?ref=snap, Source=ESP32-S3.SchLib
U1: library part CMP-20727-000002-1, "CRYSTAL 40.0000MHZ 8PF SMD", Frequency=40MHz, Load Capacitance=8pF, Manufacturer="Kyocera International Inc. Electronic Components", Package=CX2016DB, Temperature="-30°C to +85°C", Temperature Range High=+85°C, Temperature Range Low=-30°C, Tolerance=15ppm, Automotive=No, Category=Crys, ComponentLink2Description=Datasheet, ComponentLink2URL=https://global.kyocera.com/prdct/electro/product/pdf/cx2016db_e.pdf, Device Class L1="Passive Components", Device Class L2="Crystals / Oscillators", Device Class L3=Crystals, Digikey Description="CRYSTAL 40.0000MHZ 8PF SMD", Esr=50Ω, Height=0.45mm, Lead Free=Yes, Manufacturer Part Number=CX2016DB40000D0FLJCC, Mouser Description="Crystal 40MHz 8pF 4-Pin SMD T/R", Octopart=https://octopart.com/cx2016db40000d0fljcc-avx+%2F+kyocera-71139660, RoHS=TRUE, Series=CX2016DB, Stability=15ppm
U3: library part CMP-0163-00041-1, "512K bits SPI Serial SRAM with SDI and SQI Interface, 2.5 to 5.5 V, 20 MHz, -40 to 85 degC, 8-pin SOIC (SN8), Tube", Manufacturer=Microchip, ComponentLink1Description="Manufacturer URL", ComponentLink1URL=http://www.microchip.com, ComponentLink2Description=Datasheet, ComponentLink2URL=http://ww1.microchip.com/downloads/en/DeviceDoc/25155A.pdf, ComponentLink3Description="Package Specification", ComponentLink3URL=http://www.microchip.com/stellent/groups/techpub_sg/documents/packagingspec/en012702.pdf, ComponentLink4Description="Product URL", ComponentLink4URL=http://www.microchip.com/23LC512, DatasheetVersion="Rev. A", Mounting Technology="Surface Mount", PackageDescription="8-Lead Plastic Small Outline, 4.9 x 3.9 mm Body, 1.27 mm Pitch", PackageReference=SOIC-SN8, PackageVersion=C04-057C, PartNumber=23LC512-I/SN
U4: library part CMP-00561-70301700-1, "Pressure Sensor 14.5PSI (100kPa) Differential Male - 0.19 (4.93mm) Tube, Dual 0.2 V ~ 4.7 V 6-SIP Module", Ambient Temperature Range High=125°C, Case/Package=SIP, Max Supply Voltage=6V, Min Operating Temperature=-40°C, Min Supply Voltage=3V, Nominal Supply Current=6mA, Accuracy=0.4%, Height=33.09mm, Lead Free="Lead Free", Max Operating Temperature=125°C, Max Pressure=25.38PSI, Mount="Through Hole", NexarPartId=70301700, Number of Pins=4, Operating Supply Current=6mA, Output Type="Wheatstone Bridge", Packaging=Bulk, Port Style=Barbed, Pressure Type=Differential, Radiation Hardening=No, REACH SVHC="No SVHC", Response Time=1ms, RoHS=Compliant, Schedule B="8541500080, 8542390000", Termination=PCB, Weight=5.057838g
U5: library part CMP-003-000016-2, "Interface Circuit, PBGA12", Case/Package=VFBGA, Max Operating Temperature=85°C, Max Supply Voltage=5.9V, Min Operating Temperature=-40°C, Min Supply Voltage=3.5V, Package="DSBGA-12 Texas Instruments", Availability=Good, Component Type=Standard, Design Item ID=TPD1S514-1YZR, DigiKey-Purchase-URL=https://snapeda.com/shop?store=DigiKey&id=382764, Height - Seated (Max)=0.625mm, Interface IC Type="INTERFACE CIRCUIT", JESD-609 Code=e1, Length=1.99mm, MF="Texas Instruments", Mouser-Purchase-URL=https://snapeda.com/shop?store=Mouser&id=382764, MP=TPD1S514-1YZR, Pin Count=12, Pins=12, Price=None, RoHS Compliant=Yes, SnapEDA_Link=https://www.snapeda.com/parts/TPD1S514-1YZR/Texas%20Instruments/view-part/382764/?ref=snap, Source=TPD1S514-1YZR.SchLib, Texas_Instruments-Purchase-URL=https://snapeda.com/shop?store=Texas+Instruments&id=382764
U6: library part CMP-027-000125-1, "500mA +3.3V Low-Noise LDO Voltage Regulator", Manufacturer=MaxLinear, Design Item ID=SPX3819M5-L-3-3/TR, Manufacturer Part Number=SPX3819M5-L-3-3/TR, Source=Schematic-Lib-PhilsLab.SchLib
U7: library part CMP-04985-000023-1, "TVS DIODE 5.5VWM 13VC 4X2SON", Capacitance=0.55pF, Clamping Voltage=13V, Leakage Current=20nA, Max Operating Temperature=125°C, Min Breakdown Voltage=6.5V, Min Operating Temperature=-40°C, Operating Supply Voltage=5.5V, Peak Pulse Current=5A, Peak Pulse Power=35W, Power Line Protection=Yes, Depth=0.85mm, Direction=Unidirectional, Interface=USB, Lead Free="Lead Free", Length=0.85mm, Mount="Surface Mount", Number of Channels=4, Number of Pins=4, Number of Unidirectional Channels=4, Packaging="Cut Tape", Radiation Hardening=No, REACH SVHC="No SVHC", Reverse Standoff Voltage=5.5V, RoHS Compliant=Yes, Working Voltage=5.5V
U10: library part CMP-031-00019-1, "16M-BIT SERIAL FLASH MEMORY WITH DUAL/QUAD SPI USON-8", LCSC=C2843335, Manufacturer=Winbond, Design Item ID=W25Q16JVUXIQ, Manufacturer Part Number=W25Q16JVUXIQ, Source=Schematic-Lib-PhilsLab.SchLib
X1: library part CMP-27762-006068-1, "CRYSTAL 32.7680KHZ 12.5PF TH", Case/Package=Radial, ESR (Equivalent Series Resistance)=50kR, Frequency=32.768kHz, Frequency Stability=-0.034ppm, Frequency Tolerance=20ppm, Load Capacitance=12.5pF, Max Operating Temperature=85°C, Min Operating Temperature=-40°C, Operating Frequency="32.768 kHz", Package Quantity=500, Depth=1.9mm, Height=0.075inch, Lead Free="Lead Free", Lead Pitch=2.54mm, Length=6mm, Mount="Surface Mount", Number of Pins=2, Packaging="Tape and Reel", REACH SVHC="No SVHC", Series=AB26TRB, Series Resistance=50kR, Termination=Radial, Tolerance=20ppm

## Via types
v1: diameter 0.6, hole 0.3, Top Layer to Bottom Layer, 88 vias
v2: diameter 0.3, hole 0.15, Top Layer to Bottom Layer, 3 vias
v3: diameter 1.27, hole 0.711, Top Layer to Bottom Layer, 1 vias
v4: diameter 0.35, hole 0.1, Top Layer to Bottom Layer, 1 vias

## Nets (pads, with @x,y where several pads share a name; then routed paths per layer and width w, separated by ;. In a path a pad name is that pad's centre, name@x,y a point inside that pad or via, vN(x,y) a via of type N, cw(c..) or ccw(c..) an arc to the next point about the centre after c; other vN are vias at no path point)
5V: C22.1 L3.1 U4.3 U5.B1 | length 63.8
  Top Layer w0.193: U4.3 48.442,53.518 60.02,53.518 61.849,51.689 61.849,43.536 62.992,42.393 65.938,42.393 68.301,40.03 68.301,35.909 69.088,35.121 C22.1 74.021,35.121 L3.1
  Layer 2 w0.254: v1(72.9,35.1) 72.9,33.2 73.9,32.2 74.7,32.2 76.1,33.6 76.7,33.6 78.8,31.5 78.8,29.2 ; 78.9,29.1 v2(80.8,29.1)
AGPIO18: U0.24 U4.2 | length 25.6
  Top Layer w0.254: U0.24 v1@40.7,35.2
  Bottom Layer w0.254: U4.2 40.6,58.82 40.6,45.9 v1(40.6,35.3)
ANT_ESD: ANT1.1 C12.1 L2.1 U7.3 | length 68.1
  Top Layer w0.193: ANT1.1@27.56,33.65 27.93,33.65 ANT1.1@28.03,33.65 ; ANT1.1@27.56,38.35 ANT1.1@28.03,38.35 ; ANT1.1@27.762,28.9 27.812,28.95 29.16,28.95 35.55,28.95 35.9,28.6 36.231,28.931 42.274,28.931 L2.1 ; ANT1.1@29.1,32.22 29.1,32.4 ANT1.1@29.1,32.58 ; ANT1.1@29.1,36.92 29.1,37.1 ANT1.1@29.1,37.28
  Top Layer w0.254: ANT1.1@26.46,28.9 26.46,28.954 26.583,29.077 ANT1.1@26.96,29.077 ; ANT1.1@26.6,35.8 ANT1.1@26.8,35.8 ; ANT1.1@26.6,40.6 ANT1.1@26.8,40.6 ; ANT1.1@26.606,31.1 ANT1.1@26.806,31.1 ; ANT1.1@26.611,33.55 27.93,33.55 ANT1.1@28.03,33.65 ; ANT1.1@26.7,38.4 ANT1.1@26.9,38.4 ; ANT1.1@29.1,36 ANT1.1@29.1,36.2 ; ANT1.1@29.1,38 ANT1.1@29.1,38.2 ; ANT1.1@29.2,31.303 ANT1.1@29.2,31.503 ; ANT1.1@29.2,33.245 ANT1.1@29.2,33.545 ; L2.1 43.296,28.604 43.5,28.4 v1@43.5,27 ; v1@78.8,35.7 U7.3
  Bottom Layer w0.254: v1(43.3,26.8) 46.2,26.8 46.7,26.3 75.7,26.3 77.5,28.1 77.5,31 78.7,32.2 v1(78.7,35.6)
CHIP_EN: D2.A SW1.34 U0.4 | length 68.7
  Top Layer w0.193: SW1.34@59.325,61.725 63.475,61.725 63.475,58.348 67.073,54.75 D2.A
  Top Layer w0.254: v1(34.5,39.3) U0.4 ; v1@56.2,61.5 56.425,61.725 SW1.34@59.325,61.725
  Bottom Layer w0.21: 31.2,62.3 31.2,51.9 33.3,49.8 33.3,43.7
  Bottom Layer w0.254: 31.2,62.3 31.8,62.9 47.1,62.9 48.6,61.4 v1(56.1,61.4) ; 33.3,43.7 34.5,42.5 v1(34.5,39.3)
CLK_N: C29.2 R33.1 U0.22 X1.2 | length 30.7
  Top Layer w0.193: R33.1 v1(51.593,28.225) ; v1(53.368,30) X1.2 v1(57.963,30) ; v1(57.968,34.6) C29.2
  Top Layer w0.254: U0.22 39.9,33.8 40.8,32.9 40.8,32.3 41.2,31.9 v1(41.7,31.9)
  Layer 2 w0.21: v1(51.593,28.225) v1(53.368,30) ; v1(57.963,30) 57.963,34.595 v1(57.968,34.6)
  Bottom Layer w0.254: v1(41.7,31.9) 50.7,31.9 51.593,31.007 v1(51.593,28.225)
CLK_P: C28.2 R33.2 U0.21 X1.1 | length 40.7
  Top Layer w0.193: R33.2 52.181,29.175 v1(53.353,28.003) 54.058,27.298 54.242,27.298 54.444,27.5 X1.1 ; v1(60.477,35.128) 63.5,35.128 C28.2
  Top Layer w0.254: U0.21 39.5,33.3 39.796,33.004 39.796,32.362 39.834,32.323 39.834,31.366 v1(40.1,31.1)
  Layer 1 w0.21: v1(53.353,28.003) v1(60.477,35.128)
  Bottom Layer w0.21: 40.5,30.7 45.4,30.7
  Bottom Layer w0.254: v1(40.1,31.1) 40.5,30.7 ; 45.4,30.7 45.8,31.1 49,31.1 49.3,30.8 49.3,27.7 49.6,27.4 52.749,27.4 v1(53.353,28.003)
D_N: RN2.2 U0.25 | length 44.2
  Top Layer w0.142: U0.25 41.1,35.052 41.608,35.56 v1(42.215,35.56) ; RN2.2 77.724,47.6 v1(78.181,47.142)
  Bottom Layer w0.144: v1(42.215,35.56) 53.797,47.142 v1(78.181,47.142)
D_P: RN1.2 U0.26 | length 50.7
  Top Layer w0.142: U0.26 41.5,33.524 41.7,33.324 v1(41.7,33.2) ; v1(77.761,48.5) RN1.2
  Layer 1 w0.381: v1(41.7,33.2) 41.742,33.242 41.95,33.242 43.84,35.132 43.84,40.615 50.16,46.934 76.195,46.934 v1(77.761,48.5)
DN: J1.A7 J1.B7 RN2.1 U7.2 | length 47.9
  Top Layer w0.193: RN2.1 76.8,48.885 78.232,50.317 82.677,50.317 v1(84.4,48.594) 92.637,40.358 92.637,33.239 ; U7.2 v1(84.4,38.62) ; J1.B7 91.325,31.55 92.637,32.862 92.637,33.239 ; J1.A7 91.948,32.55 92.637,33.239
  Bottom Layer w0.196: v1(84.4,38.62) v1(84.4,48.594)
DP: J1.A6 J1.B6 RN1.1 U7.1 | length 43.4
  Top Layer w0.193: v1(80.074,47.549) 80.122,47.5 RN1.1 82.88,47.5 92.244,38.136 92.244,33.849 91.445,33.05 J1.B6 89.433,33.05 89.433,32.05 J1.A6 ; U7.1 81.48,34.82 v1(83,33.3)
  Bottom Layer w0.196: v1(80.074,47.549) 83,44.622 v1(83,33.3)
GND: ANT1.2 C1.1 C2.2 C3.2 C4.1 C6.2 C7.2 C8.2 C9.2 C10_15.2 C11.1 C12.2 C13.2 C14.2 C22.2 C25.2 C28.1 C29.1 C32.2 C33.2 C46.2 C290.2 C334.2 C337.2 D2.K J1.A1B12 J1.B1A12 R21.1 R22.1 R35.1 SW1.12 SW2.12 U0.57 U1.2 U1.4 U3.4 U4.1 U5.A1 U5.A4 U5.B4 U5.C1 U5.C4 U6.2 U7.5 U10.4 U10.9 | length 356.7
  Top Layer w0.193: U4.1 36,58.72 C2.2 ; C11.1@39,28.4 37.735,28.4 37.135,27.8 35.9,27.8 35.9,27.1 37.1,25.9 43.8,25.9 45.3,27.4 45.3,30.5 47.834,33.034 48.214,33.034 C1.1 48.28,34.595 50.4,36.715 C4.1 54.279,37.48 ; C8.2 v1(45.441,46.179) ; v1(47.549,42.875) 47.1,42.426 C9.2 43.8,41.5 C7.2 38.244,45.4 37.744,45.9 C6.2 35.509,45.9 35.509,50.368 36,50.368 C2.2 ; v1(50.429,39.995) U3.4 54.686,39.995 54.686,38.913 55.711,37.888 ; C10_15.2 49.397,50.079 49.276,50.2 C14.2 45.591,50.2 45.491,50.1 C13.2 41.932,50.1 41.732,50.3 C3.2 38.001,50.3 37.897,50.404 C2.2 ; U1.4@53.4,34.55 53.4,36.601 54.279,37.48 ; v1(53.848,48.438) 57.924,48.438 58,48.514 58,48.665 ; U1.2@54.8,33.45 57.074,33.45 57.124,33.4 58.142,33.4 ; U10.4 57.612,48.75 57.697,48.665 58,48.665 ; U10.9 58,48.665 ; SW1.12@63.475,63.875 59.325,63.875 58.395,62.945 58.395,56.405 C32.2 58.522,55.7 58.522,54.356 58.801,54.077 61.239,54.077 62.484,52.832 62.484,50.8 63.805,49.479 67.674,49.479 70.8,46.353 70.8,45.255 ; D2.K 70.307,56.25 70.557,56 C33.2 72.9,58.596 72.39,59.106 72.39,62.94 73.325,63.875 77.475,63.875 79.248,63.875 80.493,62.63 80.493,56.896 81.689,55.7 C46.2 86.131,55.7 86.358,55.473 R35.1 89.611,55.473 89.611,48.692 88.906,47.987 R22.1 ; R21.1 71.9,46.355 70.8,45.255 ; C25.2 78.887,41.003 78.795,41 ; J1.A1B12 89.391,29.1 88.648,29.843 88.648,34.74 89.408,35.5 J1.B1A12 ; 54.279,37.48 54.686,37.888 55.711,37.888 ; 54.279,37.48 56.119,37.48 ; 55.711,37.888 56.119,37.48 ; 56.119,37.48 56.998,36.601 56.998,34.544 58.142,33.4 ; 58.142,33.4 C29.1 61.392,33.4 61.492,33.3 C28.1 63.518,33.282 63.518,32.749 67.716,28.55 U6.2 73.258,28.55 73.787,29.079 C290.2 76.1,30.583 77.419,31.902 77.419,39.624 78.795,41 ; 70.8,45.255 C334.2 C337.2 78.795,41
  Top Layer w0.21: ANT1.2 34.95,26.85 C12.2@35.9,27.8
  Top Layer w0.254: C11.1@39,28.4 40.3,28.4 v1(40.6,28.1) ; SW1.12@63.775,63.875 67.125,63.875 68,63 D2.K ; C22.2 70.279,35.879 v1(71.5,37.1) ; 70.8,45.255 72.245,45.255 v1(72.8,44.7) ; U5.A1 80,29.5 79.9,29.4 79.9,29 80.2,28.7 U5.C1 80.8,28.2 80.9,28.1 81.9,28.1 ; U7.5@81.09,35.4 80.3,34.61 v1(80.3,33.3) 82,31.6 U5.A4 U5.B4 U5.C4 82,28 83,28 v1(83.9,27.1) ; v1(88.3,28.7) 89.019,29.419
  Layer 2 w0.21: v1(47.549,42.875) 48.285,42.875 50.429,45.019 ; v1(50.429,39.995) 50.429,45.019 ; v1(53.848,48.438) 50.429,45.019
  Layer 1 w0.21: 37.4,34.85 37.4,35.6 38.099,36.299 38.272,36.299 38.395,36.176 38.395,36.17 38.72,35.845 39.245,35.845 39.631,36.231 v1(39.681,36.231) ; v1(45.441,46.179) 47.7,48.438 v1(53.848,48.438)
  Layer 1 w0.254: 37.4,34.85 37.4,31.3 v1(40.6,28.1) ; v1(72.8,44.7) 73.3,44.2 73.3,39.7 71.5,37.9 v1(71.5,37.1) 76.7,37.1 77,36.8 77,34.8 78.5,33.3 v1(80.3,33.3)
  Bottom Layer w0.254: 52.6,35.551 52.6,33.1 53.1,32.6 55.6,32.6 56.1,33.1 56.1,35.4 55.8,35.7 52.749,35.7 ; v1(83.9,27.1) 86.7,27.1 v1(88.3,28.7)
  other v2: 53.4,35.8
  other v4: 81.09,35.46
GPIO0: C33.1 R31.1 SW2.34 U0.5 | length 92.8
  Top Layer w0.193: C33.1 75.184,55.2 76.378,56.394 ; SW2.34@73.325,61.725 SW2.34@77.089,61.725 ; R31.1 76.378,55.046 76.378,56.394 ; SW2.34@77.475,61.725 SW2.34@77.089,61.725 ; 76.378,56.394 76.378,61.014 SW2.34@77.089,61.725
  Top Layer w0.254: v1(34.5,38.1) 35.3,38.9 U0.5 ; SW2.34@77.475,61.725 77.475,60.025 v1(78.1,59.4)
  Layer 1 w0.21: 30.6,55.8 36.6,61.8
  Layer 1 w0.254: 30.6,55.8 30.6,49.4 32.4,47.6 32.4,38.3 32.6,38.1 v1(34.5,38.1) ; 36.6,61.8 45.6,61.8 48.1,59.3 57.8,59.3 58.9,60.4 70,60.4 71,59.4 v1(78.1,59.4)
GPIO46: D3.A SW3.12 U0.52 | length 79.3
  Top Layer w0.193: SW3.12@84.425,63.875 88.575,63.875 90.78,63.875 90.955,63.7 D3.A
  Top Layer w0.254: U0.52 38.7,42.8 v1(39.2,43.3) ; v3@81.725,63.875 SW3.12@84.425,63.875
  Layer 2 w0.254: v1(39.2,43.3) 39.2,43.8 38.1,44.9 38.1,63.6 38.8,64.3 56.5,64.3 57.8,63 80.8,63 v3(81.7,63.9)
LNA: C11.2 L2.2 U0.1 | length 26.8
  Top Layer w0.254: v1@33.3,40.5 U0.1@36.1,40.5 ; v1(37.6,26.7) 38.691,27.791 ; 39,26.6 39,27.791 ; 39.1,26.5 41.104,26.5 L2.2
  Bottom Layer w0.254: v1(33.2,40.4) 33.2,28.3 34.8,26.7 v1(37.6,26.7)
NetC1_2: C1.2 R4.1 U1.1 | length 11.3
  Top Layer w0.193: R4.1 47.752,28.1 49.1,29.448 C1.2 49.1,33.45 U1.1@53.4,33.45
NetC9_1: C9.1 L1.2 U0.2 U0.3 | length 37.7
  Top Layer w0.193: C9.1 47.1,39.819 v1(47.381,39.538) ; L1.2 47.726,46.1 v1(48.565,46.939)
  Top Layer w0.254: v1(33.4,41.9) 32.6,41.9 32.2,41.5 32.2,40.1 33,39.3 33.4,39.3 34.1,40 34.8,40 35.1,39.7 U0.3 U0.2
  Layer 2 w0.21: v1(47.381,39.538) 46.7,40.219 46.7,45.074 v1(48.565,46.939)
  Layer 2 w0.254: v1(33.4,41.9) 43.1,41.9 46.1,44.9 46.1,46.2 47.1,47.2 48.304,47.2 v1(48.565,46.939)
NetC32_1: C32.1 R32.1 | length 3.8
  Top Layer w0.193: C32.1 60.071,54.9 61.198,56.027 R32.1
NetC46_1: C46.1 D3.K R35.2 | length 13.6
  Top Layer w0.193: C46.1 86.131,56.5 86.358,56.727 R35.2 88.9,59.461 91.639,62.2 D3.K
NetC290_1: C290.1 C334.1 L3.2 U6.1 U6.3 | length 31.5
  Top Layer w0.193: v1(66.6,27.5) 66.65,27.55 68.5,27.55 U6.3 ; C334.1 71.208,40.222 75.3,36.13 L3.2 v1(75.3,34.239) ; v1(75.3,28.321) C290.1
  Top Layer w0.254: v1(67.2,30.9) U6.1@68.3,29.8
  Layer 1 w0.21: v1(66.6,27.5) 66.6,30.4 67.3,31.1 72.161,31.1 v1(75.3,34.239) v1(75.3,28.321)
NetC337_1: C337.1 U6.4 | length 15.4
  Top Layer w0.193: U6.4 v1(72.152,27.6) ; v1(76.5,31.948) C337.1
  Layer 2 w0.21: v1(72.152,27.6) v1(76.5,31.948)
NetJ1_A5: J1.A5 R21.2 | length 43
  Top Layer w0.193: R21.2 73.355,48.107 78.714,42.748 86.563,42.748 87.046,42.266 87.046,28.372 88.468,26.949 91.948,26.949 92.405,27.407 92.405,30.48 91.835,31.05 J1.A5
NetJ1_B5: J1.B5 R22.2 | length 20.9
  Top Layer w0.193: R22.2 89.002,48.8 v1(89.002,50.267) ; J1.B5 91.302,34.05 v1(91.313,34.061)
  Layer 2 w0.21: v1(89.002,50.267) 92.354,46.914 92.354,35.103 v1(91.313,34.061)
NetR10_2: R10.2 U0.33 | length 40.1
  Top Layer w0.193: v1(65.4,52.745) 65.9,52.245 R10.2
  Top Layer w0.254: v1(42.3,36.9) U0.33
  Layer 1 w0.254: v1(42.3,36.9) 42.3,46.5 44.4,48.6 44.4,50.5 46.645,52.745 v1(65.4,52.745)
NetR13_2: R13.2 U0.30 | length 46.2
  Top Layer w0.193: R13.2 65.9,46.906 v1(67.432,48.437)
  Top Layer w0.254: U0.30 46.7,35.7 v1(47.2,36.2) ; v1(67.432,48.437) 69.6,46.269 v1(69.6,45.8)
  Layer 1 w0.254: v1(47.2,36.2) 48.7,36.2 53,31.9 55.8,31.9 56.6,32.7 56.6,35.7 56.7,35.8 66.2,35.8 69.1,38.7 69.1,43.4 69.6,43.9 v1(69.6,45.8)
NetR14_2: R14.2 U0.31 | length 37.4
  Top Layer w0.193: R14.2 66,43.495 66.719,44.214 v1(66.719,44.426)
  Top Layer w0.254: U0.31 45.7,36.1 v1@46.2,36.6
  Layer 1 w0.254: v1(46.1,36.5) 46.5,36.5 46.9,36.9 50.5,36.9 52.4,35 55.8,35 56,35.2 56,36.6 57.3,37.9 63.6,37.9 64.7,36.8 66.1,36.8 68,38.7 68,43.146 v1(66.719,44.426)
NetR15_2: R15.2 U0.34 | length 14.9
  Top Layer w0.193: R15.2 51.1,43.705 51.819,42.986 v1(51.819,42.774)
  Top Layer w0.254: U0.34 47.1,37.3 48.5,38.7 48.5,42.4 48.874,42.774 v1(51.819,42.774)
NetR16_2: R16.2 U0.35 | length 25.9
  Top Layer w0.193: R16.2 65.2,39.064 65.837,38.427 v1(65.837,38.174)
  Top Layer w0.254: U0.35 v1@45.4,37.7
  Layer 2 w0.254: v1(45.6,37.9) 49,37.9 50.3,39.2 50.9,39.2 51.8,40.1 52.7,40.1 54.3,38.5 65.511,38.5 v1(65.837,38.174)
SPICLK: R10.1 U3.6 U10.6 | length 23.8
  Top Layer w0.193: U10.6 58.496,49.25 58.496,47.249 v1(60.508,45.237) 58.268,45.237 57.455,44.425 57.455,42.164 58.354,41.265 U3.6 ; v1(63.652,51.74) 64.9,50.492 R10.1
  Layer 2 w0.21: v1(60.508,45.237) 61.717,46.447 61.717,49.805 v1(63.652,51.74)
SPICS0: U0.32 U10.1 | length 27.6
  Top Layer w0.193: v1(54.757,50.758) 55.265,50.25 U10.1
  Top Layer w0.254: U0.32 v1@44.6,36.5
  Layer 2 w0.254: v1(44.8,36.7) 44.8,39.8 v1(45.5,40.5)
  Bottom Layer w0.254: v1(45.5,40.5) 45.5,43.4 44.5,44.4 44.5,47.6 45.6,48.7 45.6,50.2 46.158,50.758 v1(54.757,50.758)
SPICS1: U0.28 U3.1 | length 21.4
  Top Layer w0.193: v1(53.223,43.805) U3.1
  Top Layer w0.254: U0.28 42.3,33.5 42.8,33 v1(43.7,33)
  Bottom Layer w0.254: v1(43.7,33) 45.1,33 48.9,36.8 48.9,40.9 49.7,41.7 52.4,41.7 53.223,42.523 v1@53.223,43.977
SPID: R16.1 U3.5 U10.5 | length 18.6
  Top Layer w0.193: U10.5 60.812,48.75 v1(60.82,48.743) ; U3.5 v1(60.977,39.995) 61.195,40.213 66.2,40.213 R16.1
  Layer 2 w0.21: v1(60.82,48.743) 59.741,47.664 59.741,41.231 v1(60.977,39.995)
SPIHD: R13.1 U3.7 U10.7 | length 24
  Top Layer w0.193: U10.7 v1(60.215,49.75) ; U3.7 v1(60.985,42.535) ; v1(64.9,45.23) R13.1
  Layer 2 w0.21: v1(60.215,49.75) 59.309,48.844 59.309,40.64 60.579,39.37 61.341,39.37 61.595,39.624 61.595,41.925 v1(60.985,42.535) 62.205,42.535 v1(64.9,45.23)
SPIQ: R15.1 U3.2 U10.2 | length 17.7
  Top Layer w0.193: R15.1 50.1,46.468 51.97,48.338 52.504,48.338 ; U3.2 53.579,42.535 52.426,43.688 52.426,48.26 52.504,48.338 ; U10.2 56.002,49.75 55.905,49.846 54.012,49.846 52.504,48.338
SPIWP: R14.1 U3.3 U10.3 | length 24
  Top Layer w0.193: v1(53.223,41.265) U3.3 ; v1(54.889,49.225) 54.914,49.25 U10.3 ; R14.1 v1(65,44.425)
  Layer 2 w0.21: v1(53.223,41.265) 54.889,42.931 54.889,45.918 ; v1(54.889,49.225) 54.889,45.918 ; v1(56.383,44.425) 54.889,45.918
  Layer 1 w0.21: v1(56.383,44.425) v1(65,44.425)
VDD5V: J1.A4B9 J1.B4A9 U5.B3 U5.C2 U5.C3 | length 20
  Top Layer w0.193: J1.A4B9 89.23,29.9 89.041,30.09 89.041,34.434 89.306,34.7 J1.B4A9
  Top Layer w0.254: U5.C2 U5.C3 v2(81.6,29.1) ; J1.A4B9 91.4,29.9 v1(91.7,30.2)
  Bottom Layer w0.254: v2(81.6,29.1) 84.1,29.1 85.2,30.2 v1(91.7,30.2)
VDD33V: C2.1 C3.1 C6.1 C7.1 C8.1 C10_15.1 C13.1 C14.1 C25.1 L1.1 R31.2 R32.2 SW3.34 U0.20 U0.29 U0.46 U0.55 U0.56 U3.8 U6.5 U10.8 | length 205.5
  Top Layer w0.193: C2.1 36.296,49.5 C3.1 ; C6.1 36.1,44.831 37.1,44.831 39.853,44.831 46.05,38.633 47.752,38.633 48.158,39.04 48.158,44.704 47.562,45.3 L1.1 45.486,45.3 45.364,45.421 C8.1 43.434,45.421 43.155,45.701 43.155,46.245 C3.1 ; C7.1 C3.1 ; v1(58.074,43.805) U3.8 60.919,43.805 61.443,43.282 ; v1(61.529,54.773) R32.2 v1(65.775,54.773) ; U6.5 70.968,29.5 67.818,32.65 67.818,39.522 66.065,41.275 63.449,41.275 61.443,43.282 ; R31.2 v1(77.933,56.3) ; v1(80.237,40.311) C25.1 81.3,39.248 v1(81.686,38.862) ; v1(81.712,61.725) 84.425,61.725 SW3.34@88.575,61.725 ; C3.1 41.915,49.343 C13.1 45.517,49.343 45.574,49.4 C14.1 49.301,49.4 49.38,49.321 C10_15.1 52.426,49.321 54.459,51.354 57.951,51.354 59.055,50.25 U10.8 59.9,50.8 60.6,50.8 61.443,49.957 61.443,43.282
  Top Layer w0.21: 39.5,30.4 44.2,30.4 47,33.2
  Top Layer w0.254: C6.1 35.7,44.722 35.7,43.6 37.1,42.2 ; U0.56@37,41.225 37,40.9 37.3,40.6 41,40.6 41.1,40.7 U0.46 ; U0.56 37.1,42.2 ; 37.15,40.75 37.15,35.55 37.4,35.3 39.1,35.3 U0.20 39.1,30.8 39.5,30.4 ; U0.55 37.5,42.2 37.1,42.2 ; U0.29 46.9,35.3 ; 47,33.2 47,35.4
  Layer 2 w0.21: v1(58.074,43.805) 58.074,51.318 v1(61.529,54.773) ; v1(65.775,54.773) v1(80.237,40.311) ; v1(77.933,56.3) 81.686,52.547 ; v1(81.686,38.862) 81.686,52.547 ; v1(81.712,61.725) 81.686,61.7 81.686,52.547
XTAL_N: C4.2 U0.53 U1.3 | length 54.7
  Top Layer w0.193: U1.3@54.9,34.65 v1(54.9,36.8)
  Top Layer w0.254: v1(38,43.5) 38.3,43.2 U0.53 ; C4.2 51.2,38.3 v1@51.826,38.926
  Layer 2 w0.21: 37.3,30.1 45.2,30.1
  Layer 2 w0.254: 37.3,30.1 31.9,35.5 31.9,42.7 33.5,44.3 37.7,44.3 38,44 v1(38,43.5) ; 45.2,30.1 46.9,31.8 51.4,31.8 51.826,32.226 v1(51.826,39.109)
  Layer 1 w0.21: v1(51.826,39.109) 52.591,39.109 v1(54.9,36.8)
XTAL_P: R4.2 U0.54 | length 30.6
  Top Layer w0.193: v1(36.7,43.7) 36.7,43.5 37.9,42.3 U0.54 ; R4.2 46.8,29.2 v1(46.8,30.4)
  Bottom Layer w0.196: v1(36.7,43.7) 35.715,43.7 35.5,43.485 35.5,29.934 35.615,29.819 46.219,29.819 v1(46.8,30.4)
pads on no net: J1. J1.A8 J1.B8 J1.MH J1.SH U0.6 U0.7 U0.8 U0.9 U0.10 U0.11 U0.12 U0.13 U0.14 U0.15 U0.16 U0.17 U0.18 U0.19 U0.23 U0.27 U0.36 U0.37 U0.38 U0.39 U0.40 U0.41 U0.42 U0.43 U0.44 U0.45 U0.47 U0.48 U0.49 U0.50 U0.51 U0.58 U0.59 U0.60 U0.61 U0.62 U0.63 U0.64 U0.65 U0.66 U0.67 U0.68 U0.69 U4.4 U5.A2 U5.A3 U5.B2 U7.4
copper on no net: | length 3.5
  Top Layer w0.254: 38.691,27.791 39,27.791 ; 39,26.6 39.1,26.5 ; 40.6,35.3 40.7,35.2 ; 43.3,26.8 43.5,27 ; 44.6,36.5 44.8,36.7 ; 45.4,37.7 45.6,37.9 ; 51.826,38.926 51.826,39.109 ; 63.6,63.7 63.775,63.875 ; 68.3,29.5 68.3,29.8 ; 78.7,35.6 78.8,35.7 ; 79.9,29.4 80,29.5 ; 80.8,28.2 80.9,28.1 ; 81.09,35.4 81.09,35.46 ; 81.9,28.1 82,28 ; 82,28.7 82,29.1
  Layer 2 w0.254: 78.8,29.2 78.9,29.1
  Bottom Layer w0.254: 52.6,35.551 52.749,35.7

## Silkscreen, mask and mechanical layers (free items; w line width, h text height)
Top Component Center:
  lines w0.254: 121.95,35.55 122.15,35.55

## Text inside footprints (layer, text, board x,y; h text height)
D2: Mechanical 13 "+" at 68.608,54.183 h0.5 r270
D3: Mechanical 13 "+" at 92.592,64.267 h0.5 r90